# Allegro board RPI_NRF24L01MODULE.brd
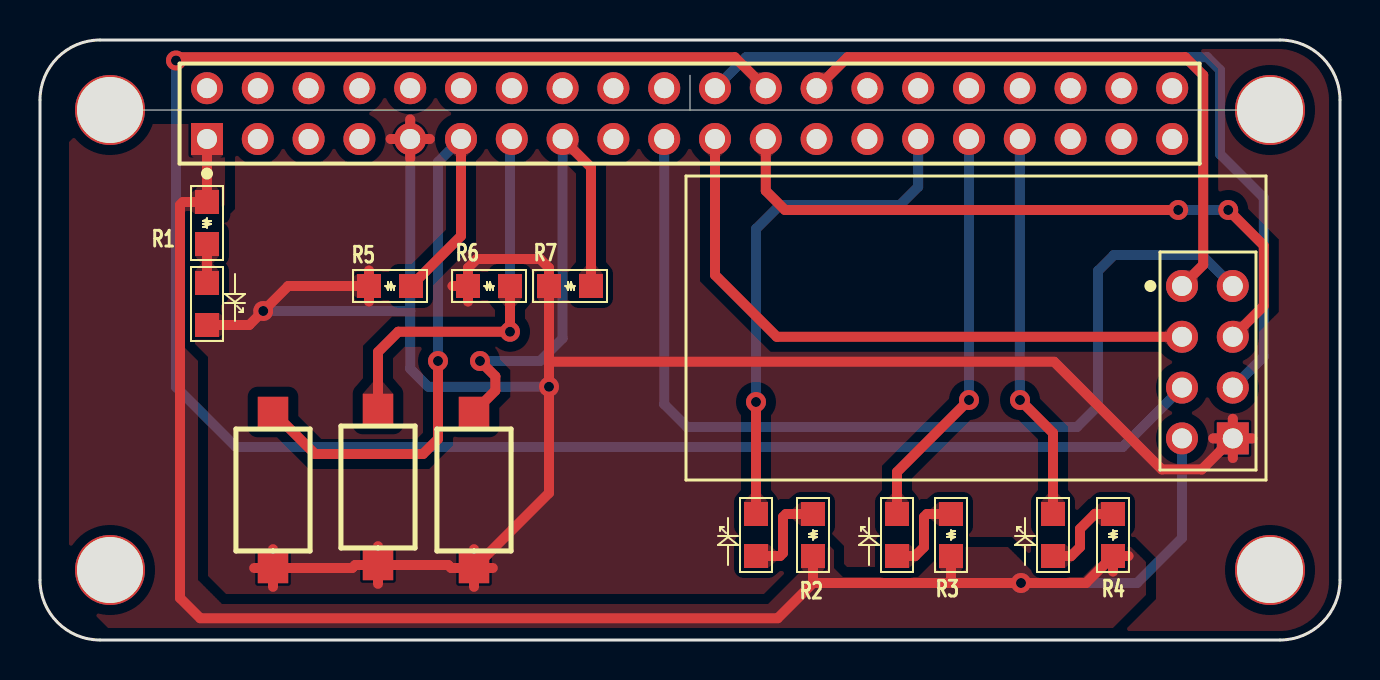
[diagram p0: board, top side]
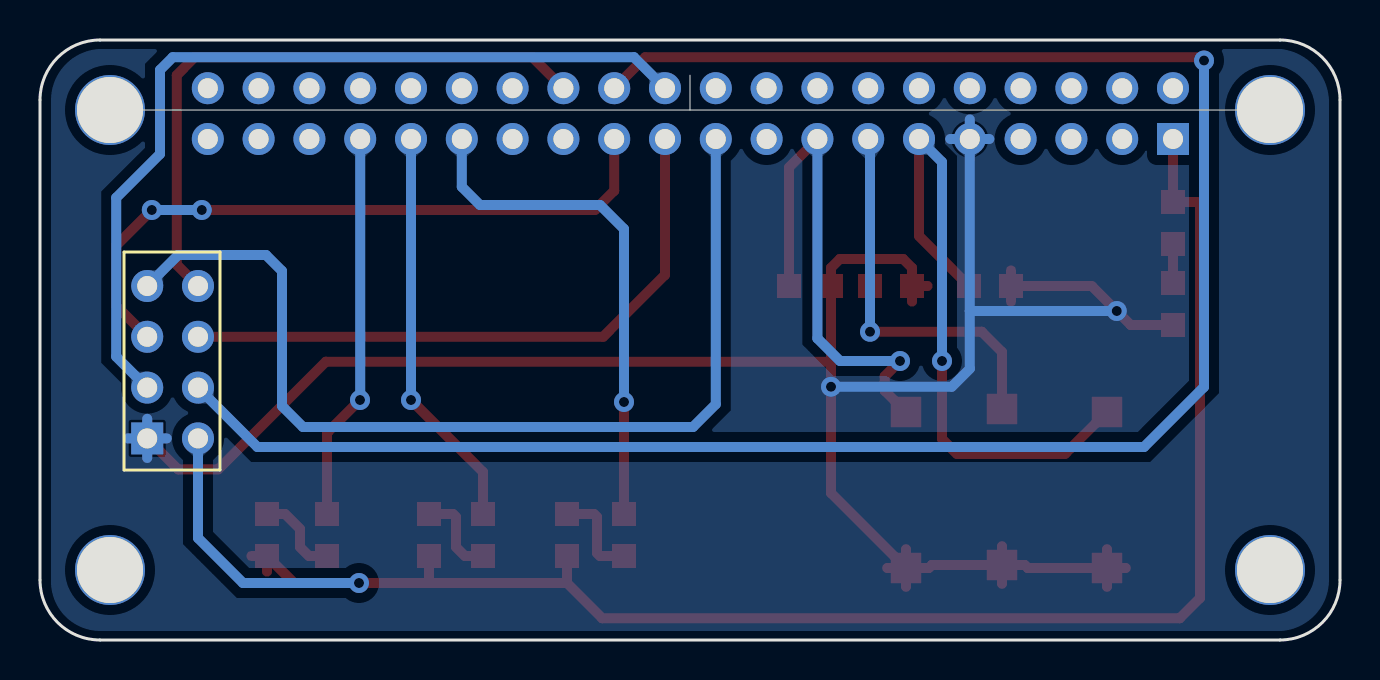
[diagram p1: board, bottom side, seen from below]

Outline 65 x 30 mm; copper layers: TOP, BOTTOM. Coordinates in mm from the lower left corner of the outline.
Outline path: circle c3.5,26.5 r1.5 ; circle c3.5,3.5 r1.5 ; circle c61.5,26.5 r1.5 ; circle c61.5,3.5 r1.5 ; 0,27 arc(0.88,29.12) 3,30 ; 0,27 arc(0.88,29.12) 3,30 ; 0,27 0,3 ; 0,27 0,3 ; 3,30 62,30 ; 3,30 62,30 ; 0,3 arc(0.88,0.88) 3,0 ; 0,3 arc(0.88,0.88) 3,0 ; 62,30 arc(64.12,29.12) 65,27 ; 62,30 arc(64.12,29.12) 65,27 ; 3,0 62,0 ; 3,0 62,0 ; 62,0 arc(64.12,0.88) 65,3 ; 62,0 arc(64.12,0.88) 65,3 ; 3.5,26.5 61.5,26.5 ; 32.5,26.5 32.5,28.24 ; 65,27 65,3 ; 65,27 65,3

## Design rules (mm)
constraint set DEFAULT: min track width 0.5

## Placement (name value [footprint] x y rotation side)
D1  LED  [LED_SMD_0805]  8.35 15.75 90 top
D2  LED  [LED_SMD_0805]  35.8 6.3 270 top
D3  LED  [LED_SMD_0805]  42.85 6.3 270 top
D4  LED  [LED_SMD_0805]  50.65 6.3 270 top
J1  RPI_HEADER  [J2_40_254]  8.35 25.05 0 top
NOREF  -  [unnamed]  3.5 26.5 0 top
NOREF#2  -  [unnamed]  3.5 3.5 0 top
NOREF#3  -  [unnamed]  61.5 26.5 0 top
NOREF#4  -  [unnamed]  61.5 3.5 0 top
R1  330R  [RES_SMD_0805]  8.35 19.8 90 top
R2  330R  [RES_SMD_0805]  38.65 6.3 270 top
R3  330R  [RES_SMD_0805]  45.55 6.3 270 top
R4  330R  [RES_SMD_0805]  53.65 6.3 270 top
R5  10K  [RES_SMD_0805]  18.55 17.7 180 top
R6  10K  [RES_SMD_0805]  23.5 17.7 180 top
R7  10K  [RES_SMD_0805]  27.55 17.7 180 top
SW1  RESET BUTTON  [SMD_2PIN_BUTTON]  11.65 7.5 90 top
SW2  RESET BUTTON  [SMD_2PIN_BUTTON]  16.9 7.65 90 top
SW3  RESET BUTTON  [SMD_2PIN_BUTTON]  21.7 7.5 90 top
U1  nRF24L01_Module  [NRF24L01_MODULE]  57.1 17.7 270 top

## Library data of the parts
D1-D4 = LED
J1 = RPI_HEADER
R1-R7 = R
SW1-SW3 = SW_PB_SPST
U1 = nRF24L01_Module

## Footprints (pads in the part's own frame, mm; a bottom-side part is the same pattern mirrored in y, then rotated)
J2_40_254
  rect 1.6x1.6 hole 1: 1(0,0)
  round 1.6 hole 1: 2(0,2.54) 3(2.54,0) 4(2.54,2.54) 5(5.08,0) 6(5.08,2.54) 7(7.62,0) 8(7.62,2.54) 9(10.16,0) 10(10.16,2.54) 11(12.7,0) 12(12.7,2.54) 13(15.24,0) 14(15.24,2.54) 15(17.78,0) 16(17.78,2.54) 17(20.32,0) 18(20.32,2.54) 19(22.86,0) 20(22.86,2.54) 21(25.4,0) 22(25.4,2.54) 23(27.94,0) 24(27.94,2.54) 25(30.48,0) 26(30.48,2.54) 27(33.02,0) 28(33.02,2.54) 29(35.56,0) 30(35.56,2.54) 31(38.1,0) 32(38.1,2.54) 33(40.64,0) 34(40.64,2.54) 35(43.18,0) 36(43.18,2.54) 37(45.72,0) 38(45.72,2.54) 39(48.26,0) 40(48.26,2.54)
LED_SMD_0805
  rect 1.2x1.2 smd: 1(0,0) 2(2.1,0)
NRF24L01_MODULE
  rect 1.6x1.6 hole 1: 1(7.62,2.54)
  round 1.6 hole 1: 2(7.62,0) 3(5.08,2.54) 4(5.08,0) 5(2.54,2.54) 6(2.54,0) 7(0,2.54) 8(0,0)
RES_SMD_0805
  rect 1.2x1.2 smd: 1(0,0) 2(2.1,0)
SMD_2PIN_BUTTON
  rect 1.524x1.524 smd: 1(-3.9,0) 2(3.9,0)
unnamed
  round 3.5 hole 3.3: (0,0)

## Nets
3V3: J1.1 R1.2 R2.2 R3.2 R4.2 U1.2(VCC)
GND: D1.1(CATHODE) J1.9 R5.2 R6.2 R7.2 SW1.1 SW2.1 SW3.1 U1.1
BUTTON1: J1.11 R5.1 SW1.2
BUTTON2: J1.13 R6.1 SW2.2
BUTTON3: J1.15 R7.1 SW3.2
NRF_CE: J1.22 U1.3
NRF_CS: J1.24 U1.4
NRF_IRQ: J1.26 U1.8
NRF_MISO: J1.19 U1.7
NRF_MOSI: J1.21(IO9/SPI_MISO) U1.6
NRF_SCK: J1.23 U1.5
N04722: D1.2 R1.1
N83618: D2.2 R2.1
N83654: D2.1(CATHODE) J1.29
N83700: D3.2 R3.1
N83742: D4.2 R4.1
N83746: D3.1(CATHODE) J1.31
N83750: D4.1(CATHODE) J1.33

Pads without a net: J1 2 3 4 5 6 7 8 10 12 14 16 17 18 20 25 27 28 30 32 34 35 36 37 38 39 40

## Via types
v1: diameter 1, hole 0.5, TOP to BOTTOM, 12 vias

## Routing (per net, layer and track width the routed paths; a pad name or vN(x,y) marks a point on that pad's centre or on a via; arc(x,y) is an arc through that point)
3V3: length 90.8
  TOP w0.5: 45.55,2.85 38.65,2.85 ; 45.55,2.85 v1(49.05,2.85) 52.3,2.85 R4.2 ; 45.55,2.85 R3.2 ; 38.65,2.85 36.89,1.09 8.01,1.09 7,2.1 7,21.75 7.15,21.9 R1.2 J1.1 ; 38.65,2.85 R2.2 ; 53.65,3.42 R4.2 ; R4.2 54.43,4.2
  BOTTOM w0.5: U1.2 57.1,5.1 54.85,2.85 v1(49.05,2.85)
GND: length 129.5
  TOP w0.5: U1.1 59.64,11.06 ; U1.1 60.62,10.08 ; U1.1 58.09,8.53 56.09,8.53 50.71,13.91 25.45,13.91 ; U1.1 59.64,9.1 ; U1.1 58.66,10.08 ; SW2.1 16.9,4.69 ; SW2.1 20.41,3.75 20.56,3.6 SW3.1 ; SW2.1 16.9,2.81 ; SW2.1 15.76,3.75 15.61,3.6 SW1.1 ; R5.2 12.41,17.7 v1(11.16,16.45) 10.46,15.75 D1.1 ; R5.2 16.45,16.92 ; R5.2 16.45,18.48 ; SW3.1 21.7,4.54 ; SW3.1 21.7,2.66 ; SW3.1 25.45,7.35 v1(25.45,12.66) 25.45,13.91 ; SW3.1 22.64,3.6 ; 17.53,25.05 J1.9 ; J1.9 18.51,26.03 ; J1.9 18.51,24.07 ; J1.9 19.49,25.05 ; 25.45,13.91 R7.2 25.45,18.6 25,19.05 21.85,19.05 21.4,18.6 R6.2 ; 11.65,2.66 SW1.1 ; SW1.1 10.71,3.6 ; SW1.1 11.65,4.54 ; R6.2 21.4,16.92 ; R6.2 20.62,17.7
  BOTTOM w0.5: 17.53,25.05 J1.9 ; J1.9 18.51,16.45 ; J1.9 18.51,26.03 ; J1.9 19.49,25.05 ; 18.51,16.45 v1(11.16,16.45) ; 18.51,16.45 18.51,13.56 19.41,12.66 v1(25.45,12.66) ; U1.1 60.62,10.08 ; U1.1 58.66,10.08 ; U1.1 59.64,11.06 ; U1.1 59.64,9.1
BUTTON1: length 33.3
  TOP w0.5: J1.11 21.05,20.2 R5.1 ; v1(19.9,13.95) 19.9,10.05 19.15,9.3 13.75,9.3 SW1.2
  BOTTOM w0.5: v1(19.9,13.95) 19.9,23.9 J1.11
BUTTON2: length 21.8
  TOP w0.5: R6.1 v1(23.5,15.41) 17.91,15.41 16.9,14.4 SW2.2
  BOTTOM w0.5: J1.13 23.5,24.96 v1(23.5,15.41)
BUTTON3: length 25.8
  TOP w0.5: J1.15 27.55,23.63 R7.1 ; v1(22,13.95) 22.77,13.18 22.77,12.47 SW3.2
  BOTTOM w0.5: J1.15 26.13,15.08 25,13.95 v1(22,13.95)
NRF_CE: length 43.6
  BOTTOM w0.5: J1.22 35.3,29.14 58.36,29.14 59,28.5 59,24.3 61.19,22.11 61.19,14.17 U1.3
NRF_CS: length 99.3
  TOP w0.5: J1.24 34.74,29.14 6.97,29.14 v1(6.8,28.97)
  BOTTOM w0.5: U1.4 54.13,9.65 9.8,9.65 6.8,12.65 v1(6.8,28.97)
NRF_IRQ: length 31.3
  TOP w0.5: U1.8 58.16,18.76 58.16,28.24 57.26,29.14 40.38,29.14 J1.26
NRF_MISO: length 50.3
  BOTTOM w0.5: J1.19 31.21,11.79 32.35,10.65 51.85,10.65 52.9,11.7 52.9,18.45 53.7,19.25 58.09,19.25 U1.7
NRF_MOSI: length 31.4
  TOP w0.5: J1.21 33.75,18.25 36.84,15.16 U1.6
NRF_SCK: length 33.8
  TOP w0.5: v1(56.91,21.5) 37.25,21.5 36.29,22.46 J1.23 ; U1.5 61.19,16.71 61.19,19.72 v1(59.41,21.5)
  BOTTOM w0.5: v1(56.91,21.5) v1(59.41,21.5)
N04722: length 1.9
  TOP w0.5: D1.2 R1.1
N83618: length 4.8
  TOP w0.5: R2.1 37.3,6.3 37.15,6.15 37.15,4.35 37,4.2 D2.2
N83654: length 25.6
  TOP w0.5: D2.1 v1(35.8,11.9)
  BOTTOM w0.5: J1.29 43.91,22.66 43,21.75 37,21.75 35.8,20.55 v1(35.8,11.9)
N83700: length 4.5
  TOP w0.5: R3.1 44.35,6.3 44.2,6.15 44.2,4.65 43.75,4.2 D3.2
N83742: length 4.4
  TOP w0.5: D4.2 51.55,4.2 52,4.65 52,5.55 52.75,6.3 R4.1
N83746: length 20.2
  TOP w0.5: D3.1 42.85,8.4 v1(46.45,12)
  BOTTOM w0.5: v1(46.45,12) J1.31
N83750: length 19.4
  TOP w0.5: D4.1 50.65,10.35 v1(49,12)
  BOTTOM w0.5: J1.33 48.99,12.01 v1(49,12)

## Copper pours and planes (outline as drawn; the poured copper is in the pictures)
3V3 on TOP: 9.1,25.8 2.35,25.8 1.45,24.9 1.45,2.55 3.4,0.6 53.65,0.6 55.3,2.25 55.3,3.9 54.55,4.65 53.65,4.65 52.15,3.15 49.9,3.15 48.4,4.65 45.4,4.65 43.9,3.15 40.15,3.15 39.7,3.6 39.7,4.5 39.4,4.8 38.2,4.8 38.05,4.65 38.05,3.45 36.4,1.8 9.1,1.8 7.9,3 7.9,13.95 7.15,14.7 7.15,21.3 7.3,21.45 8.95,21.45 9.25,21.75 9.25,25.65
GND on TOP: 2.95,0.45 1.25,1.25 0.55,3 0.55,27 1.29,28.71 2.95,29.55 62.05,29.55 63.75,28.75 64.45,27 64.45,2.85 63.73,1.17 62.05,0.45 ; 25 cut-outs
GND on BOTTOM: 2.95,0.45 1.25,1.25 0.55,3 0.55,27 1.29,28.71 2.95,29.55 62.05,29.55 63.75,28.75 64.45,27 64.45,2.85 63.73,1.17 62.05,0.45 ; 27 cut-outs

Small or netless copper shapes (teardrops, artwork), in the pictures only: 47 on TOP, 25 on BOTTOM
